# Altium PCB base_tiempo2.PcbDoc
Units mil, origin at the board's own origin, x right, y up, seen from the top; angles counter-clockwise.
Board outline 3530 x 3780 mil, 2 copper layers (Top Layer, Bottom Layer); 37 components, 50 nets, 183 pads, 39 vias.
Unrouted connection lines stored in the file: 10.
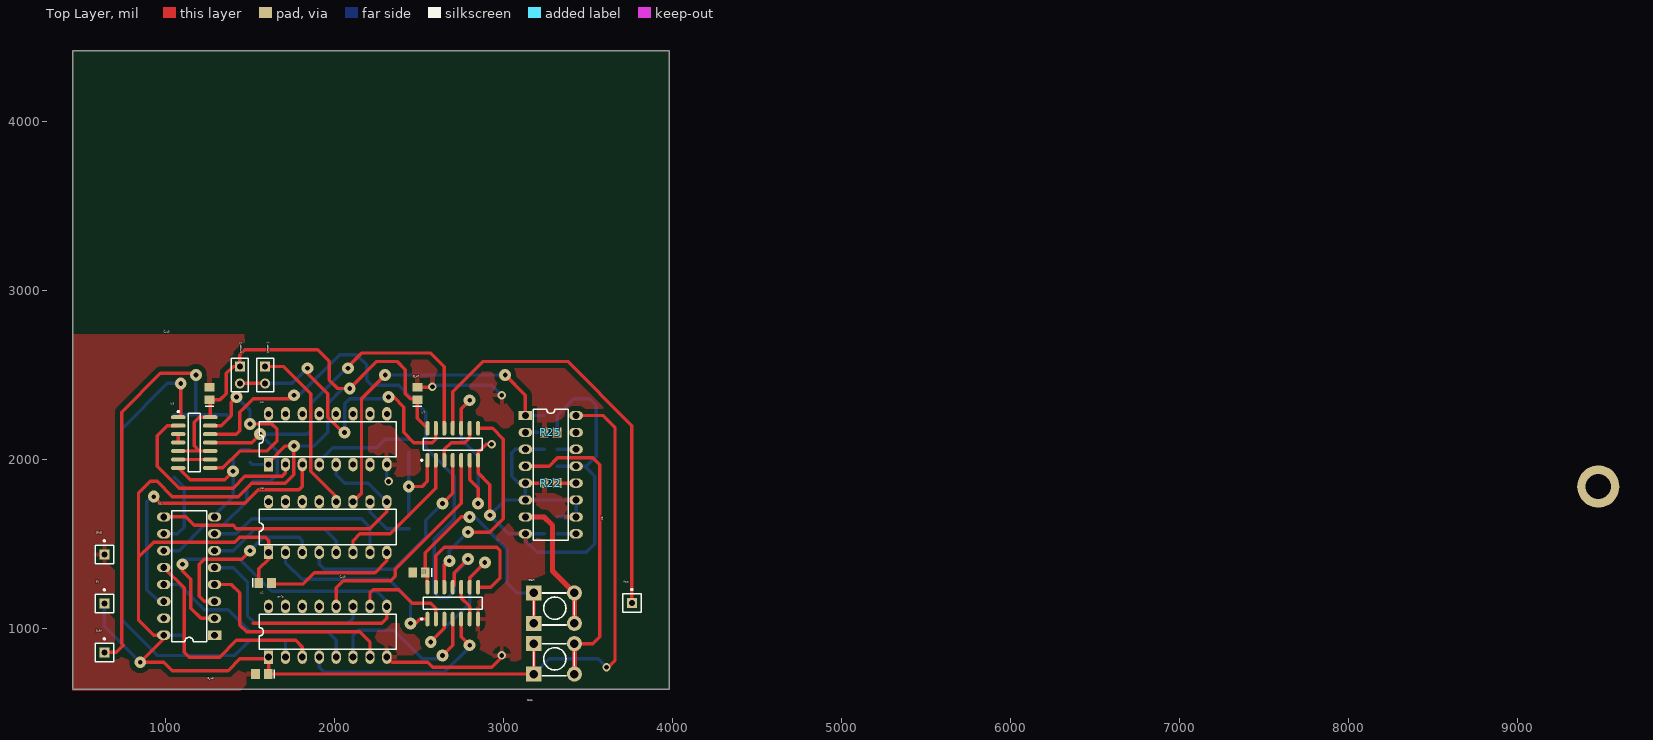
[diagram p0: Top Layer view]
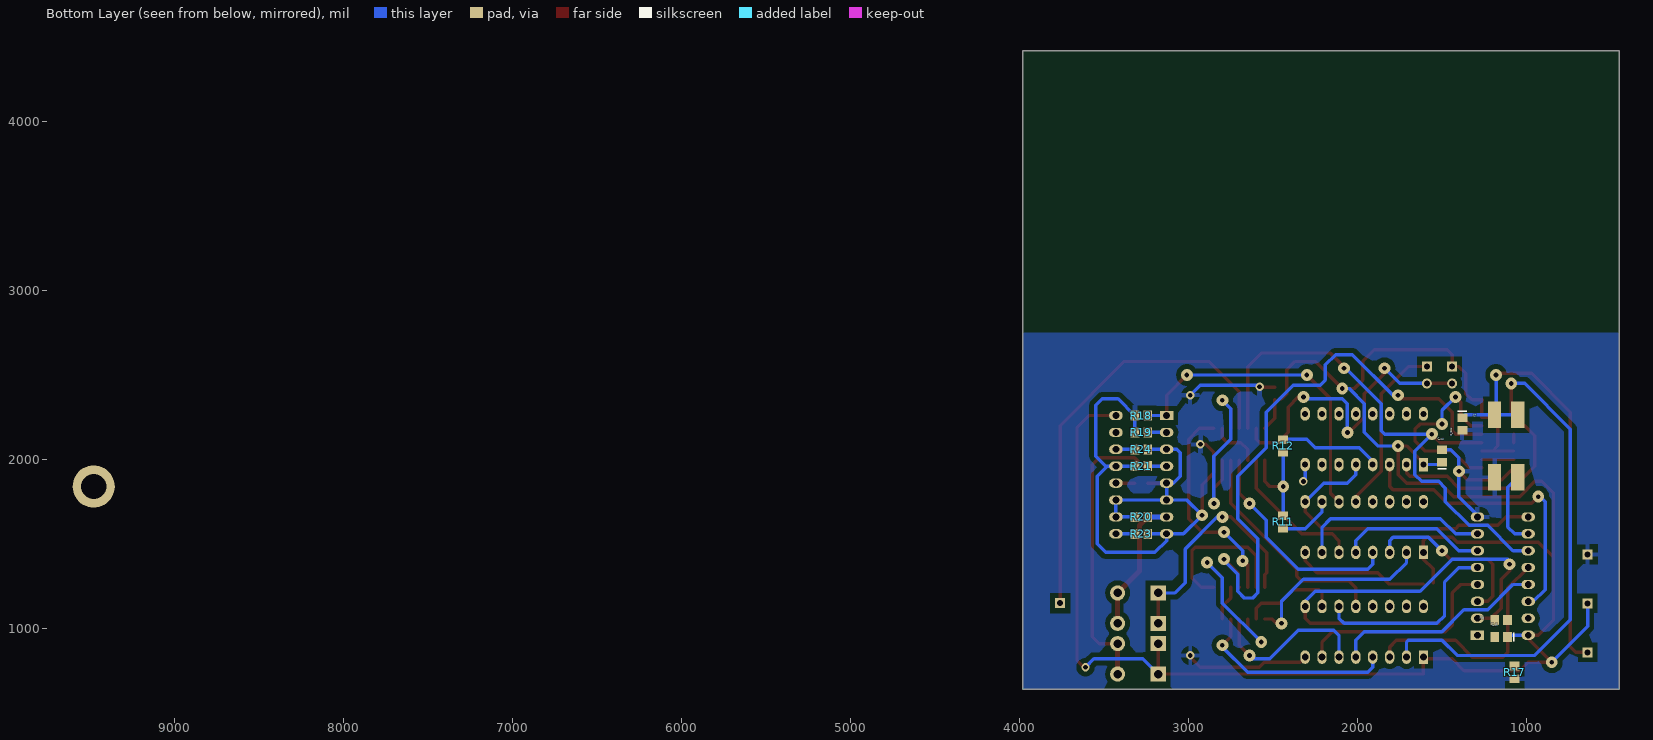
[diagram p1: Bottom Layer view, seen from below]

## Layer stack, top to bottom
Top Layer: signal copper 1.4
Dielectric: dielectric 12.6, FR-4, Dk 4.8
Bottom Layer: signal copper 1.4

## Board outline
450,4420 450,640 3980,640 3980,4420 450,4420

## Design rules (kind name [scope] priority, off if disabled: settings)
Clearance Clearance_2 [InNamedPolygon('Top Layer') Or  InNamedPolygon('Bottom Layer')] p1: gap=30
Clearance Clearance_1 [InNamedPolygon('Top Layer')] p2: gap=30
Clearance [All] p3: gap=10
PolygonConnect PolygonConnect_2 [All vs IsNamedPolygon('Bottom Layer') Or  IsNamedPolygon('Top Layer')] p1: connectstyle=Relief reliefconductorwidth=25 reliefentries=4 polygonreliefangle="90 Angle"
PolygonConnect PolygonConnect_1 [All vs IsNamedPolygon('Top Layer')] p2: connectstyle=Relief reliefconductorwidth=25 reliefentries=4 polygonreliefangle="90 Angle"
PolygonConnect [All] p3: connectstyle=Relief reliefconductorwidth=10 reliefentries=4 polygonreliefangle="90 Angle"
RoomDefinition AND_10_Entradas [InComponentClass('AND_10_Entradas')] p1: confinementstyle=ConfineIn formatcopy=TRUE lockcomponents=FALSE outline 4030,610 4870,610 4870,890 4030,890
RoomDefinition "logica arranque" [InComponentClass('logica arranque')] p2: confinementstyle=ConfineIn formatcopy=TRUE lockcomponents=FALSE outline -340,-450 5160,-450 5160,3130 -340,3130
RoomDefinition Buffer_5Bits [InComponentClass('Buffer_5Bits')] p3: confinementstyle=ConfineIn formatcopy=TRUE lockcomponents=FALSE outline -80,-790 5080,-790 5080,3370 -80,3370
RoomDefinition base_tiempo [InComponentClass('base_tiempo')] p4: confinementstyle=ConfineIn formatcopy=TRUE lockcomponents=FALSE outline -260,-560 5000,-560 5000,3000 -260,3000
RoutingVias [All] p1: holewidth=28 width=50 viastyle="Through Hole" minholewidth=28 minwidth=50 maxholewidth=28 maxwidth=50
SilkscreenOverComponentPads [All] p1: minsilkscreentomaskgap=10
SolderMaskExpansion [All] p1: expansion=4
TestPointUsage [All] p1: valid=0 allowmultiple=FALSE
Testpoint [All] p1: side=3 testpointundercomponent=TRUE minsize=40 maxsize=100 preferedsize=60 minholesize=0 maxholesize=40 preferedholesize=32 testpointgrid=1 style=297 order=0-112345678
Width [All] p1: maxlimit=100 minlimit=10 preferedwidth=20
23 further rules are at their usual default settings.

## Classes and differential pairs
component class AND_10_Entradas: C_u7 C_u8 C_u9 U7 U8 U9
component class "logica arranque": R18 R19 R20 R21 R22 R23 R24 R25 U6
component class Buffer_5Bits: C_u2 C_u3 C_u4 R11 R12 U2 U3 U4
component class base_tiempo: 3.3V 5V C_Osc C_Osc1 C_u1 fout GND "jumper 1" "jumper 2" Pin Pout1 R16 R17 Start Stop Sw_Start1 Sw_Stop1 U1 Y1

## Components (designator, comment, footprint, x,y, rotation, side; value= is the part's Value field where it differs from the comment)
3.3V "Socket" PIN1 638,858 r0 top locked
5V "Socket" PIN1 638,1148 r0 top locked
C_Osc "Cap Pol3" C0805 1380,2210 r270 bottom
C_u1 "Cap Pol3" C0805 1150,950 r0 bottom
C_u2 "Cap Pol3" C0805 1570,730 r180 top
C_u3 "Cap Pol3" C0805 1590,1270 r0 top
C_u4 "Cap Pol3" C0805 1500,2020 r90 bottom
C_u7 "Cap Pol3" C0805 2490,2390 r90 top
C_u8 "Cap Pol3" C0805 2500,1330 r180 top
C_u9 "Cap Pol3" C0805 1260,2390 r90 top
fout "Socket" PIN1 3760,1150 r0 top locked
GND "Socket" PIN1 638,1438 r0 top locked
"jumper 1" "Header 2" HDR1X2 1590,2550 r270 top
"jumper 2" "Header 2" HDR1X2 1440,2550 r270 top
R11 "Res Semi" 2012[0805] 2440,1630 r270 bottom
R12 "Res Semi" 2012[0805] 2440,2080 r90 bottom
R16 "Res Semi" 2012[0805] 1150,1050 r0 bottom
R17 "Res Semi" 2012[0805] 1070,740 r270 bottom
R18 "Res Semi" 2012[0805] 3280,2260 r0 bottom
R19 "Res Semi" 2012[0805] 3280,2160 r180 bottom
R20 "Res Semi" 2012[0805] 3280,1660 r0 bottom
R21 "Res Semi" 2012[0805] 3280,1960 r180 bottom
R22 "Res Semi" 2012[0805] 3280,1860 r0 top
R23 "Res Semi" 2012[0805] 3280,1560 r180 bottom
R24 "Res Semi" 2012[0805] 3280,2060 r0 bottom
R25 "Res Semi" 2012[0805] 3280,2160 r0 top
Start "SW-PB_1" SPST-44 3180,1210 r0 top
Stop "SW-PB_1" SPST-44 3180,910 r0 top
U1 "SN74HC4040N" N016 1140,1310 r90 top
U2 "M54HC4050F1R" DIP16#1 1960,980.24 r0 top
U3 "M54HC4049F1R" DIP16#1 1960,1600 r0 top
U4 "M54HC4050F1R" DIP16#2 1960,2120 r0 top
U6 "MC14027BCP" 648-08 3280,1910 r270 top
U7 "SN74F08D" D014_N 2700,2090 r90 top
U8 "SN74F08D" D014_N 2700,1150 r90 top
U9 "SN74F08D" D014_N 1170,2100 r0 top
Y1 "ECS-240-20-7M" ECX-3M 1120,2080 r270 bottom

## Footprints (in the part's own frame and the unit in brackets; to place one, negate y for a bottom-side part, rotate by r counter-clockwise, add the part's x,y. Pads: shape width x height; smd on the part's side, far side on the other; paste and mask are expansions set on the pad)
648-08 [mil] "DIP; 16 Leads; Row Spacing 7.62 mm; Pitch 2.54 mm"
  rect 55x80 hole 40: 1(-350,-150)
  oval 55x80 hole 40: 2(-250,-150) 3(-150,-150) 4(-50,-150) 5(50,-150) 6(150,-150) 7(250,-150) 8(350,-150) 9(350,150) 10(250,150) 11(150,150) 12(50,150) 13(-50,150) 14(-150,150) 15(-250,150) 16(-350,150)
  silkscreen extent -388,-104 388,104
2012[0805] [mm] "Chip Resistor; Body 2.0 x 1.3 mm (LxW typ)"
  rect 1.3x1.5 smd: 1(-0.95,0) 2(0.95,0)
C0805 [mm] "Chip Capacitor; Body 2.0 x 1.2 mm (LxW typ)"
  rect 1.3x1.5 smd: 1(-0.95,0) 2(0.95,0)
  silkscreen extent -1.9,-0.65 -1.9,0.65
D014_N [mm] "SOIC, 14-Leads, Body 8.7x3.9mm, Pitch 1.27mm, IPC Medium Density"
  oval 2.2x0.6 smd: 1(-2.4,3.81) 2(-2.4,2.54) 3(-2.4,1.27) 4(-2.4,0) 5(-2.4,-1.27) 6(-2.4,-2.54) 7(-2.4,-3.81) 8(2.4,-3.81) 9(2.4,-2.54) 10(2.4,-1.27) 11(2.4,0) 12(2.4,1.27) 13(2.4,2.54) 14(2.4,3.81)
  silkscreen extent -2.52,-4.4 0.9,4.78, body extent -1.95,-4.33 1.95,4.33, height 1.75
DIP16#1 [mil] "DIP; 16 Leads; Row Spacing 7.62 mm; Pitch 2.54 mm"
  rect 55x80 hole 40: 1(-350,-150)
  oval 55x80 hole 40: 2(-250,-150) 3(-150,-150) 4(-50,-150) 5(50,-150) 6(150,-150) 7(250,-150) 8(350,-150) 9(350,150) 10(250,150) 11(150,150) 12(50,150) 13(-50,150) 14(-150,150) 15(-250,150) 16(-350,150)
  silkscreen extent -406,-104 406,104
DIP16#2 [mil] "DIP; 16 Leads; Row Spacing 7.62 mm; Pitch 2.54 mm"
  rect 55x80 hole 35.43: 1(-350,-150)
  oval 55x80 hole 35.43: 2(-250,-150) 3(-150,-150) 4(-50,-150) 5(50,-150) 6(150,-150) 7(250,-150) 8(350,-150) 9(350,150) 10(250,150) 11(150,150) 12(50,150) 13(-50,150) 14(-150,150) 15(-250,150) 16(-350,150)
  silkscreen extent -406,-104 406,104
ECX-3M [mm] "Quartz Crystal, SM; 4 Leads; Body 13 x 4.7 x 4.2 mm (LxWxH)"
  rect 4x2 smd: 1(-4.7,-1.75) 2(4.7,-1.75) 3(4.7,1.75) 4(-4.7,1.75)
HDR1X2 [mm] "Connector; Header; 2 Position"
  rect 1.5x1.5 hole 0.9: 1(0,0)
  round 1.5 hole 0.9: 2(2.54,0)
  silkscreen extent -1.27,-1.27 3.81,1.27
N016 [mil] "DIP; 16 Leads; Row Spacing 7.62 mm; Pitch 2.54 mm"
  rect 55x80 hole 40: 1(-350,-150)
  oval 55x80 hole 40: 2(-250,-150) 3(-150,-150) 4(-50,-150) 5(50,-150) 6(150,-150) 7(250,-150) 8(350,-150) 9(350,150) 10(250,150) 11(150,150) 12(50,150) 13(-50,150) 14(-150,150) 15(-250,150) 16(-350,150)
  silkscreen extent -388,-104 388,104
PIN1 [mm] "Connector; Plug"
  rect 1.5x1.5 hole 0.9: 1(0,0)
  silkscreen extent -1.4,-1.4 1.4,2.17
SPST-44 [mil] "Circuit Breaker; 2 Leads"
  rect 90x90 hole 50: 1(0,0) 3(0,-180)
  round 90 hole 50: 2(240,0) 4(240,-180)
  silkscreen extent 0,-190 240,0

## Part data
C_Osc C_u1 C_u2 C_u3 C_u4 C_u7 C_u8 C_u9: "Polarized Capacitor (Surface Mount)"
"jumper 1" "jumper 2": "Header, 2-Pin"
R11 R12 R16 R17 R18 R19 R20 R21 R22 R23 R24 R25: "Semiconductor Resistor"
Start Stop: "Switch"
U1: "12-Bit Asynchronous Binary Counter"
U2 U4: "Hex Buffer/Converter Non-Inverting"
U3: "Hex Buffer/Converter Invertering"
U6: "Dual J-K Flip-Flop"
U7 U8 U9: "Quadruple 2-Input Positive-AND Gate"
Y1: "Crystal Oscillator"

## Free pads (board coordinates)
  round 250 hole 150: 0(9480,1840)

## Via types
v1: diameter 70, hole 28, Top Layer to Bottom Layer, 33 vias
v2: diameter 50, hole 28, Top Layer to Bottom Layer, 6 vias

## Nets (pads, with @x,y where several pads share a name; then routed paths per layer and width w, separated by ;. In a path a pad name is that pad's centre, name@x,y a point inside that pad or via, vN(x,y) a via of type N, cw(c..) or ccw(c..) an arc to the next point about the centre after c; other vN are vias at no path point)
3.3V: 3.3V.1 C_Osc.1 Y1.1 Y1.4 | length 2627.8
  Top Layer w20: 3.3V.1 708,858 750,900 740,910 740,2280 970,2510 1170,2510 v1(1180,2500)
  Bottom Layer w20: Y1.4 Y1.1 ; v1(1180,2500) 1180,2273.94 Y1.1 ; C_Osc.1 1362.36,2265.04 Y1.1
10KHZ: U1.11 U7.12 U9.11 | length 3288.3
  Top Layer w20: U9.11 1510,2100 v1(1560,2150) ; v1(2080,2540) 2080,2550 2160,2630 2570,2630 2650,2550 U7.12
  Bottom Layer w20: U1.11 1080,1460 1230,1610 1340,1610 1480,1750 1480,1830 1520,1870 1620,1870 1660.47,1910.47 1660.47,2049.53 v1(1560,2150) 1840,2150 1860.47,2170.47 1860.47,2330.47 2070,2540 v1(2080,2540)
AND0: U7.3 U7.9 | length 298
  Top Layer w20: U7.3 2650,2060 2690,2100 2770,2100 2800,2130 U7.9
AND1: U7.6 U7.10 | length 1134.6
  Top Layer w20: U7.10 2750,2300 v1(2800,2350) ; U7.6 2800,1880 2850,1830 v1(2850,1740)
  Bottom Layer w20: v1(2800,2350) 2750,2300 2750,2120 2850,2020 v1(2850,1740)
AND2: U7.8 U8.12 | length 1299.2
  Top Layer w20: U8.12 2650,1380 2660,1390 v1@2690,1390 ; v1(2790,1570) 2920,1570 3000,1650 3000,2120 2935.51,2184.49 U7.8
  Bottom Layer w20: v1@2690,1390 v1(2680,1400) 2680,1460 v1(2790,1570)
AND3: U8.3 U8.9 | length 954
  Top Layer w20: v1(2570,920) 2650,1000 U8.3 ; U8.9 2800,1300 v1(2890,1390)
  Bottom Layer w20: v1(2570,920) 2800,1150 2800,1300 v1(2890,1390)
AND4: U8.6 U8.10 | length 209.7
  Top Layer w20: U8.10 2750,1180 2800,1130 U8.6
AND5: U8.8 U8.13 | length 907.5
  Top Layer w20: U8.13 2600,1430 2650,1480 2960,1480 2980,1460 2980,1300 2924.49,1244.49 U8.8
AND6: U8.11 U9.12 | length 3493.2
  Top Layer w20: U9.12 1420,2150 1440,2170 1440,2280 1520,2360 1740,2360 v1(1760,2380) ; U8.11 2710,1254.49 2710,1330 v1(2790,1410)
  Bottom Layer w20: v1(1760,2380) 1790,2380 2030,2620 2130,2620 2190,2560 2190,2470 2220,2440 2380,2440 2540,2280 2540,2070 2710,1900 2710,1650 2590,1530 2590,1210 2620,1180 2670,1180 2710,1220 2710,1320 2790,1400 v1(2790,1410)
AND7: U9.3 U9.4 | length 50
  Top Layer w20: U9.4 U9.3
AND8: U9.6 U9.9 | length 189
  Top Layer w20: U9.6 U9.9
AND9: U9.8 U9.13 | length 1170.1
  Top Layer w20: U9.8 1340,1950 1440,2050 1600,2050 1660,2110 1660,2180 1630,2210 v1(1500,2210) ; U9.13 1330,2200 1390,2260 1390,2340 v1(1420,2370)
  Bottom Layer w20: v1(1420,2370) 1500,2290 v1(1500,2210)
C0: U1.9 U3.9 U4.5 | length 1876.7
  Top Layer w20: U1.9 1120,1660 1170,1610 1400,1610 1420,1590 2210,1590 2310,1690 U3.9
  Bottom Layer w20: U4.5 2010,1910 2060,1860 2200,1860 U3.9
C1: U1.7 U3.7 | length 1128
  Bottom Layer w20: U1.7 1420,1560 1510,1650 2160,1650 2210,1600 U3.7
C2: U1.6 U3.5 | length 872.8
  Bottom Layer w20: U1.6 1400,1460 1530,1590 1940,1590 2010,1520 U3.5
C3: U1.5 U2.11 | length 1156.5
  Bottom Layer w20: U1.5 1400,1360 1485,1275 1485,1075 1530,1030 2080,1030 2110,1060 U2.11
C4: U1.3 U3.3 | length 1047
  Top Layer w20: U1.3 1230,1160 1200,1190 1200,1380 1230,1410 1450,1410 v1(1500,1460)
  Bottom Layer w20: v1(1500,1460) 1580,1540 1790,1540 1810,1520 U3.3
C5: U1.2 U2.9 | length 2685.7
  Top Layer w20: v1(1100,1380) 1100,1340 1150,1290 1150,1120 1210,1060 U1.2 ; 1520,1030 2280,1030 2310,1060 U2.9
  Bottom Layer w20: v1(1100,1380) 1100,1400 1110,1410 1440,1410 1630,1220 2250,1220 2310,1160 U2.9
C6: U1.4 U2.7 | length 1261.9
  Top Layer w20: U1.4 1390,1260 1440,1210 1440,1020 1480,980 2150,980 2210,920 U2.7
C7: U1.13 U2.5 | length 1256.5
  Bottom Layer w20: U1.13 1080,1260 1230,1110 1370,1110 1500,980 1960,980 2010,930 U2.5
C8: U1.12 U2.3 | length 1379.9
  Top Layer w20: U1.12 1110,1240 1110,860 1140,830 1320,830 1420,930 1770,930 1810,890 U2.3
C9: U1.14 U4.3 | length 1769.4
  Top Layer w20: v1(930,1780) 970,1740 1470,1740 1550,1820 1790,1820 1810,1840 U4.3
  Bottom Layer w20: v1(930,1780) 920,1780 890,1750 890,1230 960,1160 U1.14
CLK: U1.10 Y1.3 | length 455.9
  Bottom Layer w20: U1.10 1070,1560 1110,1600 1110,1836.06 Y1.3
GND: C_Osc.2 C_u1.2 C_u2.2 C_u3.2 C_u4.2 C_u7.2 C_u8.2 C_u9.2 GND.1 R16.2 R17.2 R18.2 R19.1 R20.2 R21.1 R22.1 R23.2 R24.1 R25.1 U1.8 U2.8 U3.8 U4.8 U6.3 U6.5 U6.6 U6.8 U6.10 U6.11 U6.13 U7.7 U8.7 U9.7 Y1.2 | length 7362.1
  Top Layer w20: U9.7 1145.51,1880 1350,1880 v1(1400,1930) ; C_u3.2@1610,1262.6 1812.6,1262.6 1880,1330 2240,1330 2310,1400 U3.8 ; U2.8 2340.24,800 2550.73,800 2580.73,770 2930,770 2990,830 v2(2990,840) ; C_u7.2 2577.4,2427.4 v2(2580,2430) ; v1(2920,1670) 2920,1850 2850,1920 U7.7 2850,2042.44 2897.56,2090 v2(2930,2090) ; U6.5 R22.1
  Bottom Layer w20: U1.8 1290,1670 1400,1780 1400,1880 1400,2010 ; v1(1400,1930) 1400,2010 ; C_u4.2 1447.4,2057.4 1400,2010 ; U4.8 2310,1880 v2(2320,1870) ; v2(2580,2430) 2590,2440 2930,2440 v2(2990,2380) ; R23.2 U6.8 ; R24.1 U6.3 3070,2060 3050,2040 3050,1900 3090,1860 U6.5 U6.6 ; R20.2 U6.10 U6.11 U6.6 ; R21.1 U6.13 3480,1960 ; R19.1 R18.2 3417.4,2360 3510,2360 3550,2320 3550,2020 3490,1960 3480,1960 ; U6.8 3030,1560 v1(2920,1670) 3010,1760 U6.6 ; U6.8 3130,1520 3200,1450 3490,1450 3540,1500 3540,1900 3480,1960
Netfout_1: fout.1 U7.11 | length 2557.5
  Top Layer w20: U7.11 2700,2400 2880,2580 3380,2580 3760,2200 fout.1
"Netjumper 1_2": "jumper 1.2" "jumper 2.2" U7.13 | length 1941.6
  Top Layer w20: 1440,2450 1590,2450 ; v1(1840,2540) 1840,2510 1960.47,2389.53 1960.47,2249.49 2049.96,2160 v1(2060,2160) ; v1(2320,2370) 2350,2370 2410,2310 2410,2160 2470,2100 2580,2100 2600,2120 U7.13
  Bottom Layer w20: 1590,2450 1750,2450 v1(1840,2540) ; v1@2080,2180 v1(2060,2160) 2060,2330 2090,2360 2310,2360 v1(2320,2370)
NetR11_2: R11.2 U3.10 | length 334
  Bottom Layer w20: U3.10 2210,1690 2310,1590 R11.2@2442.6,1590
NetR12_2: R12.2 U4.4 | length 606.4
  Bottom Layer w20: U4.4 1910,1990 1990,2070 2250,2070 2300,2120 R12.2@2442.6,2120
NetR16_1: R16.1 U1.15
NetR17_1: R17.1 U1.1
NetR18_1: R18.1 U3.11 U6.1 | length 1941
  Top Layer w20: U3.11 2160,1800 2160,2360 v1(2300,2500) ; v1(3010,2500) 3130,2380 U6.1
  Bottom Layer w20: v1(2300,2500) v1(3010,2500) ; U6.1 R18.1
NetR19_2: R19.2 U6.2 | length 112.6
  Bottom Layer w20: U6.2 R19.2
NetR20_1: R20.1 Start.2 Start.4 U6.7 | length 927.2
  Top Layer w30: U6.7 3240,1660 3290,1610 3290,1340 Start.2 Start.4
  Bottom Layer w30: U6.7 R20.1
NetR21_2: R21.2 Stop.2 Stop.4 U6.4 | length 1956.4
  Top Layer w20: U6.4 3270,1960 3320,2010 3530,2010 3570,1970 3570,950 3530,910 Stop.2
  Top Layer w30: Stop.4 Stop.2
  Bottom Layer w20: U6.4 R21.2
NetR22_2: R22.2 U6.12 | length 112.6
  Top Layer w20: R22.2 U6.12
NetR23_1: R23.1 U6.9 | length 112.6
  Bottom Layer w20: R23.1 U6.9
NetR24_2: R24.2 U6.14 | length 112.6
  Bottom Layer w20: R24.2 U6.14
NetR25_2: R25.2 U6.15
Q0: R11.1 R12.1 U7.1 | length 623.1
  Top Layer w20: v1(2440,1840) 2520,1840 2550,1870 U7.1
  Bottom Layer w20: R11.1 v1(2440,1840) R12.1
Q1: U3.6 U7.2 | length 853.9
  Top Layer w20: U3.6 2110,1520 2150,1560 2330,1560 2600,1830 U7.2
Q2: U3.4 U7.4 | length 1312.9
  Top Layer w20: v1(2640,1740) 2700,1800 U7.4
  Bottom Layer w20: U3.4 1910,1380 1940,1350 2350,1350 2540,1540 2540,1640 v1(2640,1740)
Q3: U2.12 U7.5 | length 1335.8
  Top Layer w20: U2.12 2010,1240 2053.13,1283.13 2333.13,1283.13 2360,1310 2360,1350 2750,1740 U7.5
Q4: U3.2 U8.1 | length 1135.8
  Top Layer w20: v1(2450,1030) 2480,1030 2505.51,1055.51 U8.1
  Bottom Layer w20: U3.2 1710,1390 1810,1290 2320,1290 2450,1160 v1(2450,1030)
Q5: U2.10 U8.2 | length 588.1
  Top Layer w20: U2.10 2210,1210 2230,1230 2380,1230 2460,1150 2570,1150 2600,1120 U8.2
Q6: U2.6 U8.4 | length 991.3
  Top Layer w20: v1(2640,840) 2700,900 U8.4
  Bottom Layer w20: U2.6 2110,960 2140,990 2350,990 2520,820 2620,820 v1(2640,840)
Q7: U2.4 U8.5 | length 1211
  Top Layer w20: U8.5 2750,950 v1(2800,900)
  Bottom Layer w20: U2.4 1910,770 1940,740 2650,740 2800,890 v1(2800,900)
Q8: U2.2 U9.1 | length 2986
  Top Layer w20: U9.1 1090,2264.49 v1(1090,2450)
  Bottom Layer w20: v1(1090,2450) 1010,2450 740,2180 740,1050 950,840 1410,840 1500,930 1700,930 1710,920 U2.2
Q9: U4.2 U9.2 | length 1231.5
  Top Layer w20: U9.2 1010,2200 950,2140 950,1960 1080,1830 1400,1830 1470,1900 1690,1900 1710,1920 U4.2
ST/SP: "jumper 1.1" U3.12 | length 1038.4
  Top Layer w20: 1590,2550 1700,2550 1860.47,2389.53 1860.47,1929.53 2010,1780 U3.12
VCC: 5V.1 "jumper 2.1" C_u1.1 C_u2.1 C_u3.1 C_u4.1 C_u7.1 C_u8.1 C_u9.1 Start.1 Start.3 Stop.1 Stop.3 U1.16 U2.1 U3.1 U4.1 U6.16 U7.14 U8.14 U9.5 U9.10 U9.14 | length 13809.9
  Top Layer w20: U9.5 1200,2050 ; U9.10 1200,2050 ; C_u3.1 1552.6,1352.6 1610,1410 U3.1 1610,1520 1590,1540 1440,1540 1410,1510 930,1510 840,1420 ; U4.1 1610,1980 1710,2080 v1(1760,2080) 1760,1910 1710,1860 1510,1860 1430,1780 1040,1780 950,1870 910,1870 840,1800 840,1420 ; 2460,2360 2450,2360 2420,2390 2420,2530 2370,2580 2250,2580 v1(2090,2420) 2020,2420 1970,2470 1970,2580 1900,2650 1470,2650 1440,2620 1440,2550 1400,2550 1360,2510 1360,2390 1322.6,2352.6 C_u9.1 1264.49,2348.11 U9.14 1200,2250 1170,2220 1170,2080 1200,2050 ; C_u7.1 2490,2244.49 U7.14 ; U8.14 2550,1317.4 C_u8.1 2537.4,1447.4 2750,1660 v1(2800,1660) ; Stop.1 Stop.3 C_u2.1 1610,732.6 U2.1 1599.76,820 1440,820 1370,750 1040,750 990,800 v1(850,800) 990,940 U1.16 930,960 840,1050 840,1420 ; Start.3 Start.1 ; U6.16 3590,2260 3660,2190 3660,810 3620,770 v2(3610,770)
  Bottom Layer w20: 5V.1 638,1012 v1(850,800) ; U1.16 1102.6,960 C_u1.1 ; C_u4.1 1512.6,1970 U4.1 ; v1(1760,2080) 1880,2080 1960,2160 1960,2330 2050,2420 v1(2090,2420) ; v1(2800,1660) 2830,1660 3020,1470 3020,1270 3080,1210 Start.1 ; Stop.3 3270,820 3560,820 v2(3610,770)
pads on no net: U2.13 U2.14 U2.15 U2.16 U3.13 U3.14 U3.15 U3.16 U4.6 U4.7 U4.9 U4.10 U4.11 U4.12 U4.13 U4.14 U4.15 U4.16

## Polygon pours and split planes (outlines as drawn)
GND on Top Layer "Top Layer" (solid, remove dead copper, pour order 1000): 450,2740 450,630 3980,630 3980,2740 450,2740
GND on Bottom Layer "Bottom Layer" (solid, remove dead copper, pour order 1001): 450,2750 450,640 3980,640 3980,2750 450,2750

## Other copper
Top Layer:
  pour cut-out: 5780,2100 6098.73,2100 6099.83,2700 5780,2700
Bottom Layer:
  pour cut-out: 5780,2100 6098.73,2100 6099.83,2700 5780,2700

## Silkscreen, mask and mechanical layers (free items; w line width, h text height)
Mechanical 1:
  lines w30: 450,640 450,2750 3980,2750 3980,640 450,640